# Altium PCB PCB_3U_SMA.PCBDOC
Units mm, origin at the board's own origin, x right, y up, seen from the top; angles counter-clockwise.
Board outline 63.4 x 100 mm, 4 copper layers (TopLayer, MidLayer2, MidLayer8, BottomLayer), stack 1.662 mm thick; 33 components, 0 nets, 198 pads, 0 vias.
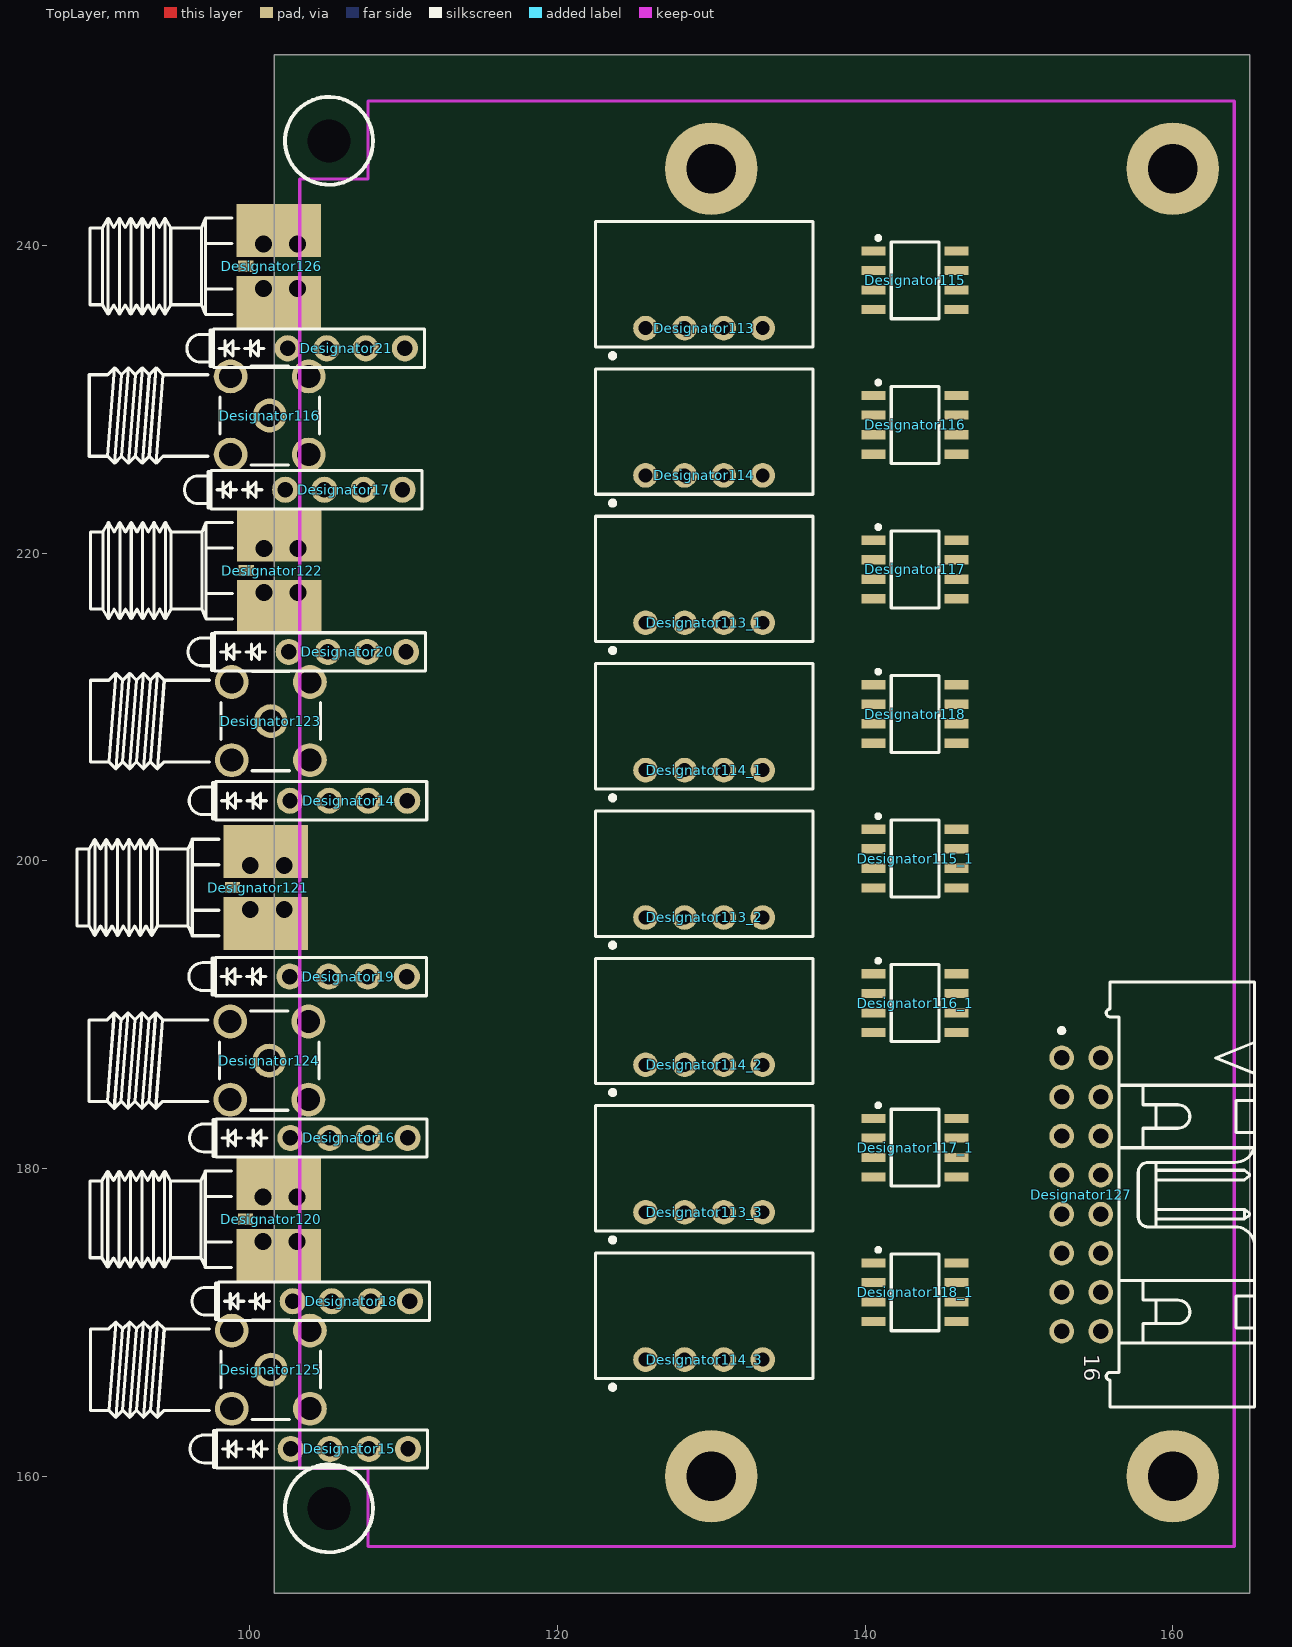
[diagram p0: TopLayer view]
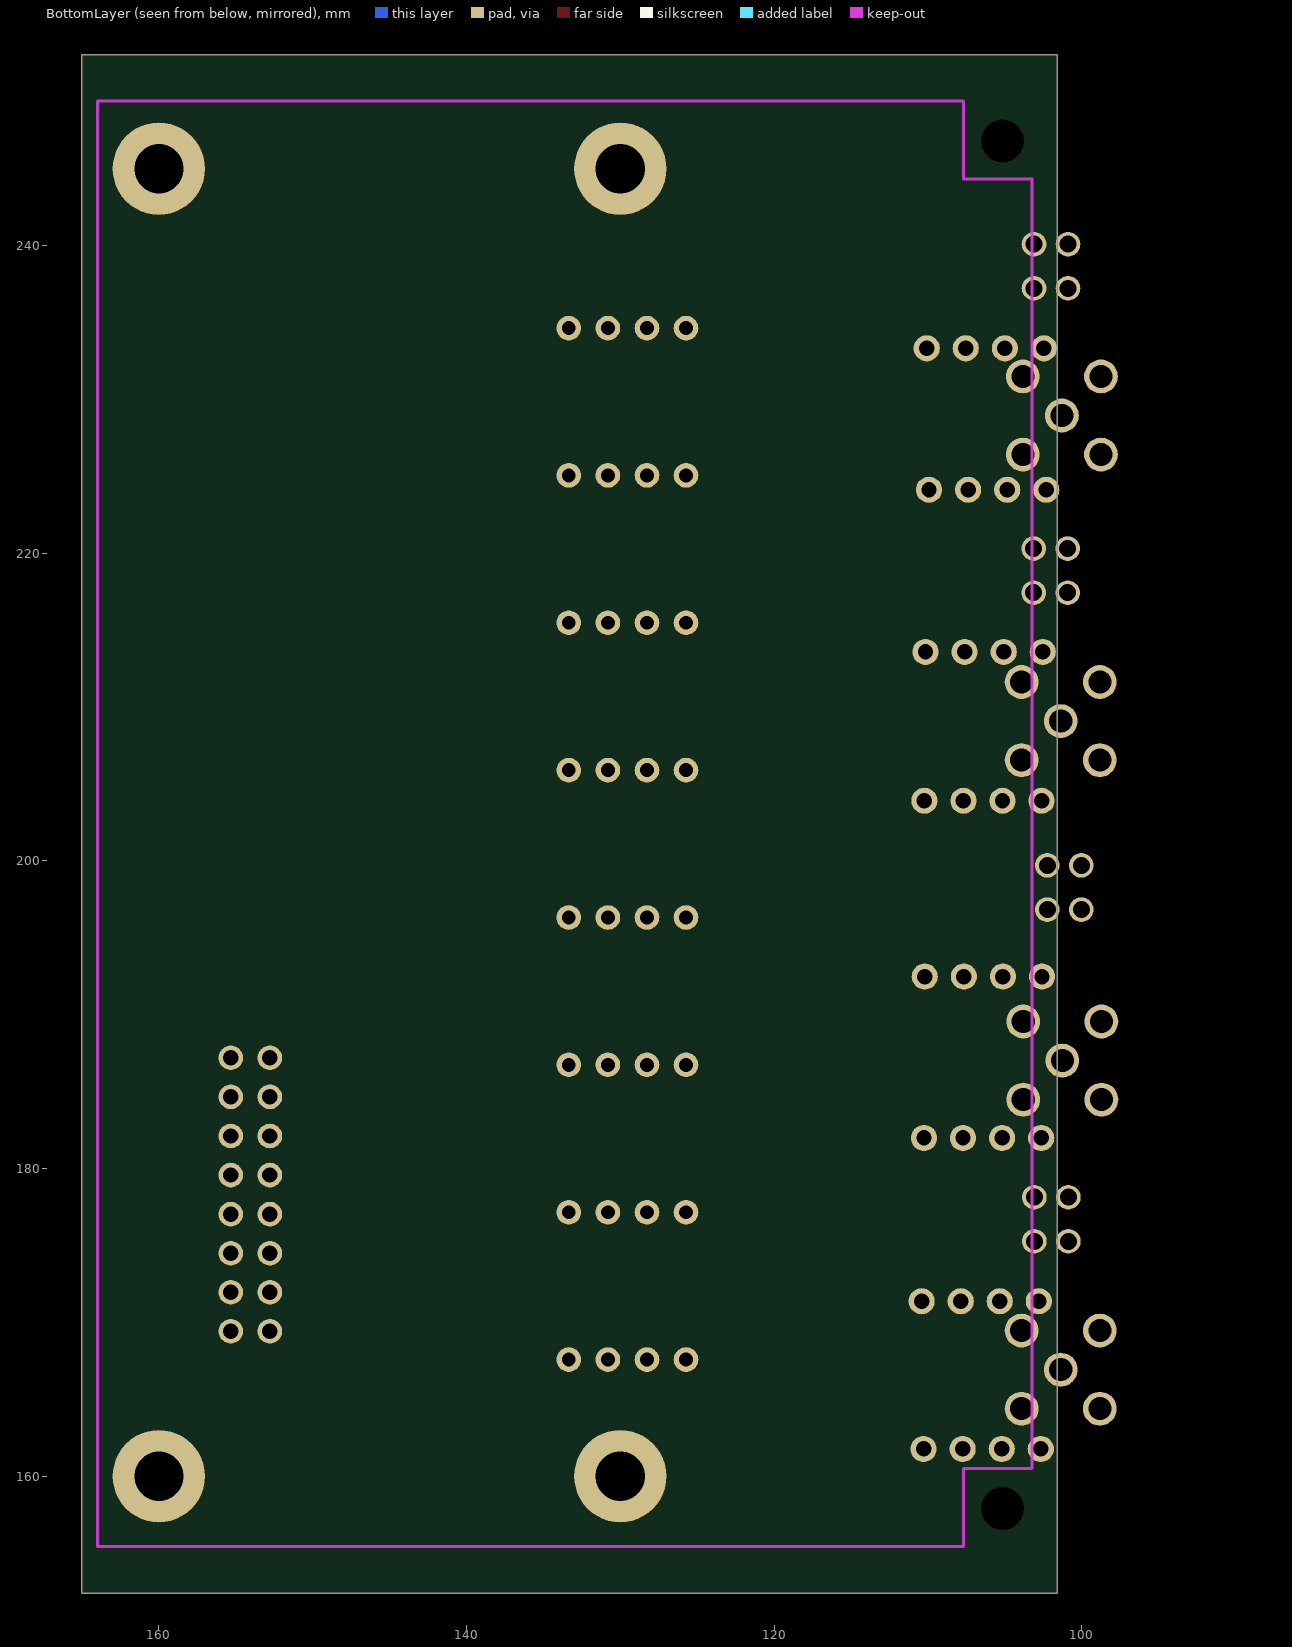
[diagram p1: BottomLayer view, seen from below]

## Layer stack, top to bottom
TopSolder: solder mask 0.0102, Solder Resist, Dk 3.5
TopLayer: signal copper 0.0356
Dielectric1: core 0.6, FR-4, Dk 4.8
MidLayer2: signal copper 0.0356
Dielectric2: prepreg 0.6, FR-4, Dk 4.8
MidLayer8: signal copper 0.0356
Dielectric3: core 0.32, FR-4, Dk 4.8
BottomLayer: signal copper 0.0356
BottomSolder: solder mask 0.0102, Solder Resist, Dk 3.5

## Board outline
101.6,152.4 165,152.4 165,252.4 101.6,252.4

## Design rules (kind name [scope] priority, off if disabled: settings)
Clearance [All] p1: gap=0.254
FabricationTestPointUsage TestPointUsage [All] p1: valid=0 allowmultiple=FALSE
FabricationTestpoint Testpoint [All] p1: side=3 testpointundercomponent=TRUE minsize=1.016 maxsize=2.54 preferedsize=1.524 minholesize=0.508 maxholesize=1.016 preferedholesize=0.813 testpointgrid=0.025 allowsidetop=TRUE allowsidebottom=TRUE usegrid=TRUE gridtolerance=0
PlaneClearance [All] p1: clearance=0.254
PolygonConnect [All] p1: connectstyle=Relief reliefconductorwidth=0.254 reliefentries=4 polygonreliefangle="90 Angle" airgapwidth=0.254
RoutingVias [All] p1: holewidth=0.711 width=1.27 viastyle="Through Hole" minholewidth=0.711 minwidth=1.27 maxholewidth=0.711 maxwidth=1.27
SilkToSolderMaskClearance SilkscreenOverComponentPads [IsPad] p1: minsilkscreentomaskgap=0.254 clearancetoexposedcopper=TRUE
SolderMaskExpansion [All] p1: expansion=0.051
Width [All] p1: maxlimit=0.254 minlimit=0.254 preferedwidth=0.254
26 further rules are at their usual default settings.

## Components (designator, comment, footprint, x,y, rotation, side; value= is the part's Value field where it differs from the comment)
Designator14 "Comment" LED_DIALIGHT_571-0112F 102.616,203.911 r0 top
Designator15 "Comment" LED_DIALIGHT_571-0112F 102.667,161.773 r0 top
Designator16 "Comment" LED_DIALIGHT_571-0112F 102.641,181.991 r0 top
Designator17 "Comment" LED_DIALIGHT_571-0112F 102.311,224.13 r0 top
Designator18 "Comment" LED_DIALIGHT_571-0112F 102.794,171.374 r0 top
Designator19 "Comment" LED_DIALIGHT_571-0112F 102.591,192.481 r0 top
Designator20 "Comment" LED_DIALIGHT_571-0112F 102.54,213.589 r0 top
Designator21 "Comment" LED_DIALIGHT_571-0112F 102.464,233.324 r0 top
Designator113 "Comment" DCDC_MURATA_MEE3 129.54,237.49 r0 top
Designator113_1 "Comment" DCDC_MURATA_MEE3 129.54,218.331 r0 top
Designator113_2 "Comment" DCDC_MURATA_MEE3 129.54,199.172 r0 top
Designator113_3 "Comment" DCDC_MURATA_MEE3 129.54,180.013 r0 top
Designator114 "Comment" DCDC_MURATA_MEE3 129.54,227.911 r0 top
Designator114_1 "Comment" DCDC_MURATA_MEE3 129.54,208.752 r0 top
Designator114_2 "Comment" DCDC_MURATA_MEE3 129.54,189.593 r0 top
Designator114_3 "Comment" DCDC_MURATA_MEE3 129.54,170.434 r0 top
Designator115 "Comment" SOIC127P600X175-8N 143.256,237.744 r0 top
Designator115_1 "Comment" SOIC127P600X175-8N 143.256,200.152 r0 top
Designator116 "Comment" SOIC127P600X175-8N 143.256,228.346 r0 top
Designator116 "Comment" HUBER-SUHNER_85_SMA-50-0-101/111_NE 101.295,228.956 r180 top
Designator116_1 "Comment" SOIC127P600X175-8N 143.256,190.754 r0 top
Designator117 "Comment" SOIC127P600X175-8N 143.256,218.948 r0 top
Designator117_1 "Comment" SOIC127P600X175-8N 143.256,181.356 r0 top
Designator118 "Comment" SOIC127P600X175-8N 143.256,209.55 r0 top
Designator118_1 "Comment" SOIC127P600X175-8N 143.256,171.958 r0 top
Designator120 "Comment" JOHNSON_142-0761-821 99.725,176.704 r0 top
Designator121 "Comment" JOHNSON_142-0761-821 98.882,198.272 r0 top
Designator122 "Comment" JOHNSON_142-0761-821 99.771,218.872 r0 top
Designator123 "Comment" HUBER-SUHNER_85_SMA-50-0-101/111_NE 101.371,209.093 r180 top
Designator124 "Comment" HUBER-SUHNER_85_SMA-50-0-101/111_NE 101.27,187.02 r180 top
Designator125 "Comment" HUBER-SUHNER_85_SMA-50-0-101/111_NE 101.371,166.929 r180 top
Designator126 "Comment" JOHNSON_142-0761-821 99.746,238.658 r0 top
Designator127 "Comment" 3M_N2516-5002RB 154.051,178.308 r270 top

## Footprints (in the part's own frame and the unit in brackets; to place one, negate y for a bottom-side part, rotate by r counter-clockwise, add the part's x,y. Pads: shape width x height; smd on the part's side, far side on the other; paste and mask are expansions set on the pad)
3M_N2516-5002RB [mm] "16 Contacts - Right Angle .100\" x .100\" Low Profile Four-Wall Header"
  round 1.6 hole 1: 1(-8.89,-1.27) 2(-8.89,1.27) 3(-6.35,-1.27) 4(-6.35,1.27) 5(-3.81,-1.27) 6(-3.81,1.27) 7(-1.27,-1.27) 8(-1.27,1.27) 9(1.27,-1.27) 10(1.27,1.27) 11(3.81,-1.27) 12(3.81,1.27) 13(6.35,-1.27) 14(6.35,1.27) 15(8.89,-1.27) 16(8.89,1.27)
  silkscreen extent -13.81,-1.42 13.82,11.28, body extent -13.81,-1.59 13.82,11.27, height 8.64
DCDC_MURATA_MEE3 [mm] "MEE3 Series , Body 14.15 x 8.15mm, SIP Package"
  round 1.6 hole 0.9: 1(-3.81,-2.85) 2(-1.27,-2.85) 3(1.27,-2.85) 4(3.81,-2.85)
  silkscreen extent -7.08,-4.8 7.08,4.08, body extent -7.07,-4.07 7.08,4.08, height 10.25
HUBER-SUHNER_85_SMA-50-0-101/111_NE [mm] "50 Ohm SMA Right Angle PCB Jack"
  round 2.2 hole 1.5: 1(0,0) 2(-2.54,2.54) 2(-2.54,-2.54) 2(2.54,2.54) 2(2.54,-2.54)
  silkscreen extent -3.23,-3.23 11.73,3.23, body extent -3.23,-3.23 11.73,3.23, height 9.6
JOHNSON_142-0761-821 [mm] "SMA 50 Ohm End Launch Jack Receptacle"
  rect 1x0.724 smd: 1(0,0)
  round 1.6 hole 1.1: 2(1.15,-1.435) 2(1.15,1.435) 2(3.36,-1.435) 2(3.36,1.435)
  rect 5.5x3.44 smd: 2(2.15,-2.338) 2(2.15,2.328)
  silkscreen extent -10.12,-3.14 -0.9,3.14, body extent -10.12,-3.13 3.95,3.14, height 3.3
LED_DIALIGHT_571-0112F [mm] "2x 2mm LED (Top: Red, Bot: Green) PCB Edge Mounting (Without positioning pins) DIALIGHT 571 Serie"
  round 1.7 hole 1: 1(0,0) 2(2.54,0) 3(5.08,0) 4(7.62,0)
  silkscreen extent -6.55,-1.24 8.89,1.24, body extent -6.55,-1.24 8.89,1.24, height 8.61
SOIC127P600X175-8N [mm] "SOIC 8, Pitch 1.27mm - Body 4x5mm, IPC Medium Density"
  rect 1.55x0.6 smd: 1(-2.7,1.905) 2(-2.7,0.635) 3(-2.7,-0.635) 4(-2.7,-1.905) 5(2.7,-1.905) 6(2.7,-0.635) 7(2.7,0.635) 8(2.7,1.905)
  silkscreen extent -2.52,-2.5 1.55,2.88, body extent -3.1,-2.5 3.1,2.5, height 1.75

## Part data
Designator113 Designator113_1 Designator113_2 Designator113_3 Designator114 Designator114_1 Designator114_2 Designator114_3 Designator115 Designator115_1 Designator116 Designator116 Designator116_1 Designator117 Designator117_1 Designator118 Designator118_1 Designator120 Designator121 Designator122 Designator123 Designator124 Designator125 Designator126 Designator127: library part "HARTING_16 25 170 1301 000"

## Free pads (board coordinates)
  round 6 hole 3.2: 0(160,160) 1(160,245) 2(130,245) 3(130,160)
  round 1.27 hole 2.794: 1(105.156,246.812) 2(105.156,157.912)

## Nets (pads, with @x,y where several pads share a name; then routed paths per layer and width w, separated by ;. In a path a pad name is that pad's centre, name@x,y a point inside that pad or via, vN(x,y) a via of type N, cw(c..) or ccw(c..) an arc to the next point about the centre after c; other vN are vias at no path point)
pads on no net: Designator14.1 Designator14.2 Designator14.3 Designator14.4 Designator15.1 Designator15.2 Designator15.3 Designator15.4 Designator16.1 Designator16.2 Designator16.3 Designator16.4 Designator17.1 Designator17.2 Designator17.3 Designator17.4 Designator18.1 Designator18.2 Designator18.3 Designator18.4 Designator19.1 Designator19.2 Designator19.3 Designator19.4 Designator20.1 Designator20.2 Designator20.3 Designator20.4 Designator21.1 Designator21.2 Designator21.3 Designator21.4 Designator113.1 Designator113.2 Designator113.3 Designator113.4 Designator113_1.1 Designator113_1.2 Designator113_1.3 Designator113_1.4 Designator113_2.1 Designator113_2.2 Designator113_2.3 Designator113_2.4 Designator113_3.1 Designator113_3.2 Designator113_3.3 Designator113_3.4 Designator114.1 Designator114.2 Designator114.3 Designator114.4 Designator114_1.1 Designator114_1.2 Designator114_1.3 Designator114_1.4 Designator114_2.1 Designator114_2.2 Designator114_2.3 Designator114_2.4 Designator114_3.1 Designator114_3.2 Designator114_3.3 Designator114_3.4 Designator115.1 Designator115.2 Designator115.3 Designator115.4 Designator115.5 Designator115.6 Designator115.7 Designator115.8 Designator115_1.1 Designator115_1.2 Designator115_1.3 Designator115_1.4 Designator115_1.5 Designator115_1.6 Designator115_1.7 Designator115_1.8 Designator116.1 Designator116.2 Designator116.3 Designator116.4 Designator116.5 Designator116.6 Designator116.7 Designator116.8 Designator116_1.1 Designator116_1.2 Designator116_1.3 Designator116_1.4 Designator116_1.5 Designator116_1.6 Designator116_1.7 Designator116_1.8 Designator117.1 Designator117.2 Designator117.3 Designator117.4 Designator117.5 Designator117.6 Designator117.7 Designator117.8 Designator117_1.1 Designator117_1.2 Designator117_1.3 Designator117_1.4 Designator117_1.5 Designator117_1.6 Designator117_1.7 Designator117_1.8 Designator118.1 Designator118.2 Designator118.3 Designator118.4 Designator118.5 Designator118.6 Designator118.7 Designator118.8 Designator118_1.1 Designator118_1.2 Designator118_1.3 Designator118_1.4 Designator118_1.5 Designator118_1.6 Designator118_1.7 Designator118_1.8 Designator120.1 Designator120.2 Designator121.1 Designator121.2 Designator122.1 Designator122.2 Designator123.1 Designator123.2 Designator124.1 Designator124.2 Designator125.1 Designator125.2 Designator126.1 Designator126.2 Designator127.1 Designator127.2 Designator127.3 Designator127.4 Designator127.5 Designator127.6 Designator127.7 Designator127.8 Designator127.9 Designator127.10 Designator127.11 Designator127.12 Designator127.13 Designator127.14 Designator127.15 Designator127.16

## Keep-outs
KeepOutLayer:
  lines w0.203: 103.251,160.503 103.251,244.323 107.696,244.323 107.696,249.403 164,249.403 164,155.423 107.696,155.423 107.696,160.503 103.251,160.503

## Silkscreen, mask and mechanical layers (free items; w line width, h text height)
TopOverlay:
  circle w0.254: c105.156,246.812 r2.857
  circle w0.254: c105.156,157.912 r2.857
Mechanical1:
  the board outline again, w0.508

## Dimensions
101.092,157.912 to 101.6,152.4 on Mechanical4
105.156,151.892 to 101.6,152.4 on Mechanical4

## Text inside footprints (layer, text, board x,y; h text height)
Designator127: TopOverlay "16" at 154.258,167.933 h1.02 r270; Mechanical14 "16" at 154.258,167.933 h1.02 r270